# EAGLE board self-balan (EAGLE 9.3.0)
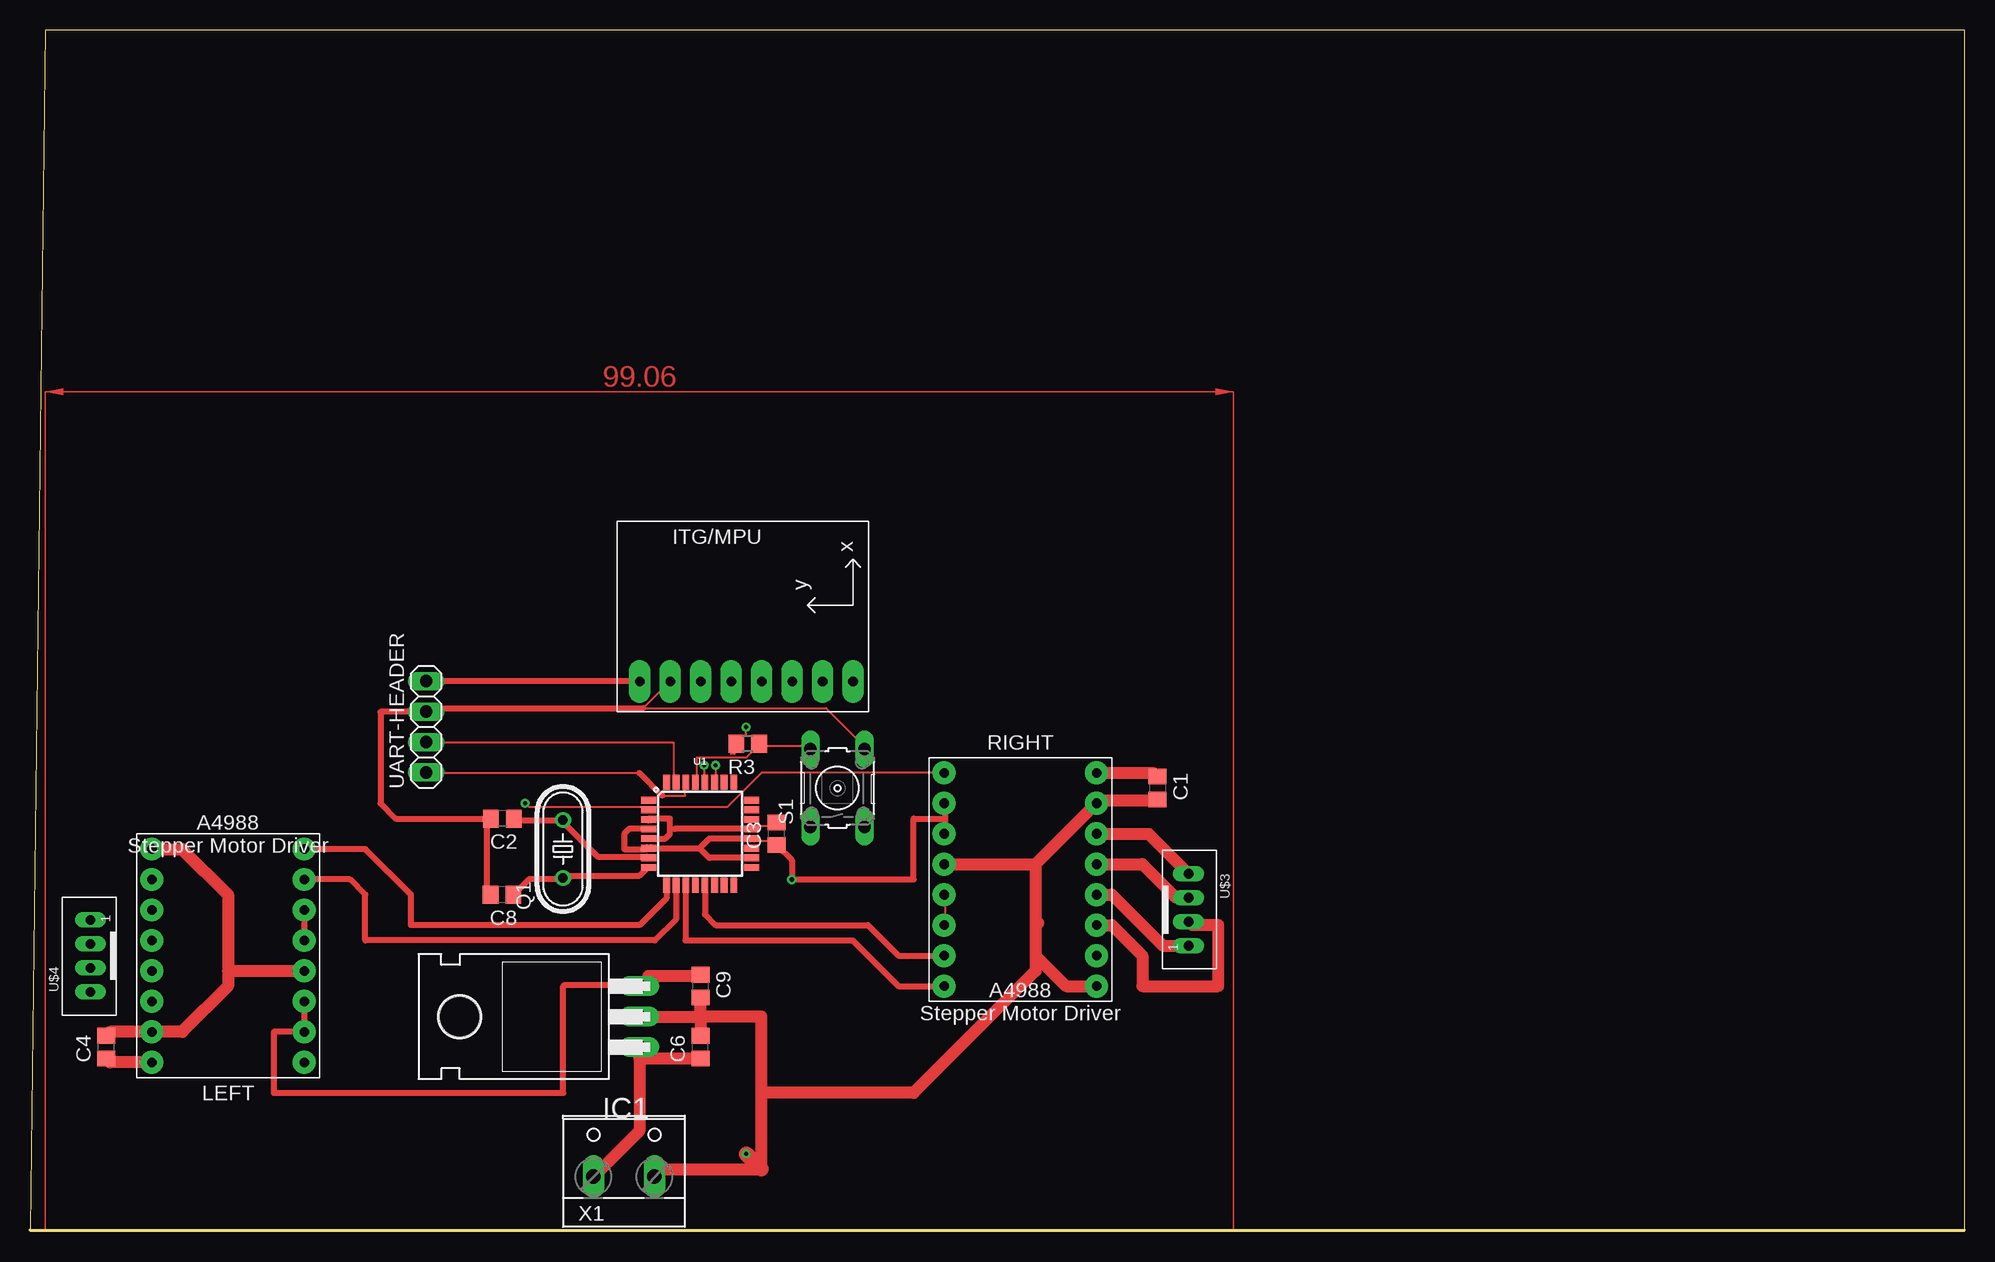
[diagram p0: board, top side]
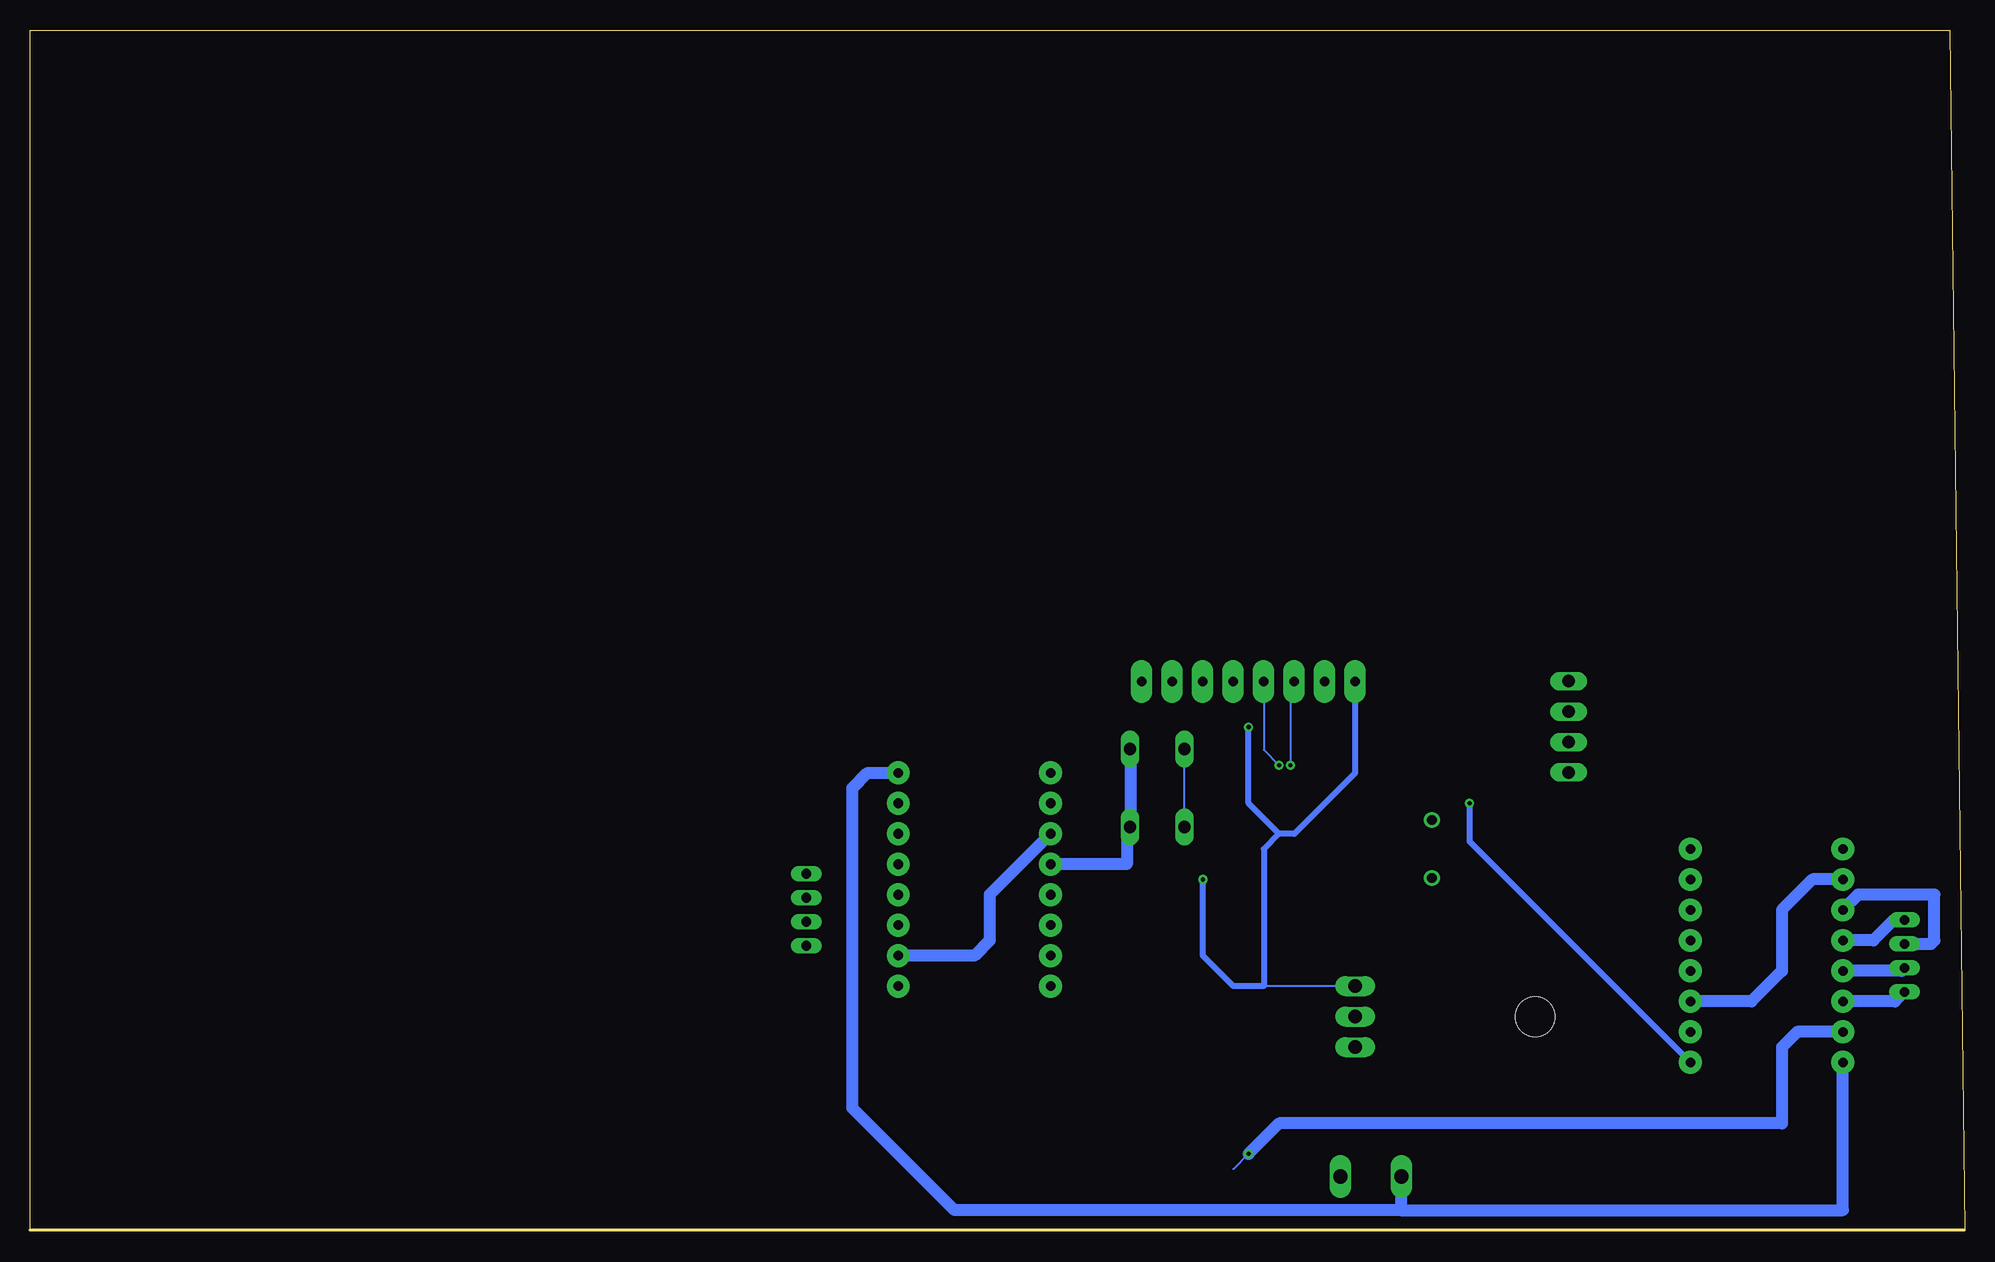
[diagram p1: board, bottom side, seen from below]

Size 161.27 x 100 mm. Coordinates in mm from the lower left corner, seen from the top.
Outline: 0,0 161.27,0 161.27,100 1.27,100 0,0
Copper layers (1*16): Top 0.035mm / dielectric 1.5mm / Bottom 0.035mm
Design rules "default": minimum track width 6mil, minimum drill 0.35mm, track to track 6mil, track to pad 6mil, pad to pad 6mil, via to via 6mil, smd to smd 6mil, copper to edge 40mil, drill to drill 6mil, minimum pad ring 10mil, minimum via ring 8mil, stop-mask expansion 4mil, vias tented up to drill 0mil, thermal gap 10mil

## Footprints (pad centres in the part's own frame; a part is rotated, then mirrored left to right if it is on the bottom)
C0805 = smd 1.3 x 1.5: 1 -0.95,0; 2 0.95,0
TO220H = drill 1.118 long: 1 -2.54,-10.16; 2 0,-10.16; 3 2.54,-10.16 | hole 3.302: 0,4.826
A4988_STEP = drill 0.8 pad 1.905: 1A 6.35,-1.27; 1B 6.35,-3.81; 2A 6.35,1.27; 2B 6.35,3.81; /EN -6.35,8.89; /RST -6.35,-1.27; /SLP -6.35,-3.81; DIR -6.35,-8.89; GND 6.35,6.35; GND2 6.35,-8.89; MS1 -6.35,6.35; MS2 -6.35,3.81; MS3 -6.35,1.27; STEP -6.35,-6.35; VDD 6.35,-6.35; VMOT 6.35,8.89
HC49/S = drill 0.813: 1 -2.413,0; 2 2.413,0
R0805 = smd 1.3 x 1.5: 1 -0.95,0; 2 0.95,0
B3F-10XX = drill 1.016 long: 1 -3.251,2.261; 2 3.251,2.261; 3 -3.251,-2.261; 4 3.251,-2.261
TQFP32-08 = smd 1.27 x 0.559: 1 -4.293,2.8; 2 -4.293,2; 3 -4.293,1.2; 4 -4.293,0.4; 5 -4.293,-0.4; 6 -4.293,-1.2; 7 -4.293,-2; 8 -4.293,-2.8; 17 4.293,-2.8; 18 4.293,-2; 19 4.293,-1.2; 20 4.293,-0.4; 21 4.293,0.4; 22 4.293,1.2; 23 4.293,2; 24 4.293,2.8 | smd 0.559 x 1.27: 9 -2.8,-4.293; 10 -2,-4.293; 11 -1.2,-4.293; 12 -0.4,-4.293; 13 0.4,-4.293; 14 1.2,-4.293; 15 2,-4.293; 16 2.8,-4.293; 25 2.8,4.293; 26 2,4.293; 27 1.2,4.293; 28 0.4,4.293; 29 -0.4,4.293; 30 -1.2,4.293; 31 -2,4.293; 32 -2.8,4.293
GY-521 = drill 0.8 pad 1.778 long: ADO -8.89,-6.35; GND -8.89,6.35; INT -8.89,-8.89; SCL -8.89,3.81; SDA -8.89,1.27; VCC -8.89,8.89; XCL -8.89,-3.81; XDA -8.89,-1.27
JST_B4B-PH_HEADER = drill 0.8 long: P1 2.98,0.048; P2 0.98,0.048; P3 -1.02,0.048; P4 -3.02,0.048
1X04 = drill 1.016 long: 1 -3.81,0; 2 -1.27,0; 3 1.27,0; 4 3.81,0
W237-132 = drill 1.194 long: 1 -2.54,-0.635; 2 2.54,-0.635

## Placement (x,y rotation side)
C1  100u  [C0805]  93.98,36.83 270 top
C2  [C0805]  39.37,34.29 180 top
C3  [C0805]  62.23,33.02 90 top
C4  100u  [C0805]  6.35,15.24 90 top
C6  10u  [C0805]  55.88,15.24 90 top
C8  [C0805]  39.34,27.94 180 top
C9  10u  [C0805]  55.88,20.32 270 top
IC1  7805T  [TO220H]  40.64,17.78 90 top
LEFT  A4988_STEP  [A4988_STEP]  16.51,22.86 180 top
Q1  [HC49/S]  44.42,31.75 90 top
R3  [R0805]  59.82,40.51 180 top
RIGHT  A4988_STEP  [A4988_STEP]  82.55,29.21 0 top
S1  [B3F-10XX]  67.31,36.83 90 top
U1  ATMEGA328P_TQFP  [TQFP32-08]  55.85,33.02 0 top
U2  GY-521MPU6050  [GY-521]  59.72,54.61 90 top
U$3  JST-PH_4-PIN_HEADER  [JST_B4B-PH_HEADER]  96.52,26.67 270 top
U$4  JST-PH_4-PIN_HEADER  [JST_B4B-PH_HEADER]  5.08,22.86 90 top
UART-HEADER  [1X04]  33.02,41.94 90 top
X1  [W237-132]  49.5,5.08 0 top

## Library data of the parts
C1-C4 C6 C8 C9 = rcl; SPICEPREFIX: C
IC1 = linear
LEFT RIGHT = IC
Q1 = crystal; OC_FARNELL: 1667008; OC_NEWARK: unknown
R3 = rcl; SPICEPREFIX: R
S1 = switch-omron; MPN: B3F-1000; OC_FARNELL: 176432; OC_NEWARK: 36M3542
U1 = SparkFun-IC-Microcontroller; PROD_ID: IC-09069
U2 = gy-521
U$3 U$4 = SRG
UART-HEADER = pinhead
X1 = con-wago-508; OC_FARNELL: unknown; OC_NEWARK: unknown

## Nets
+5V: C3.1 C9.1 IC1.3 LEFT.MS1 LEFT.MS2 LEFT.VDD R3.2 RIGHT.MS1 RIGHT.MS2 RIGHT.VDD U1.4 U1.6 U1.18 U1.20 U2.VCC UART-HEADER.4
D3: U1.1
D4: LEFT./EN RIGHT./EN U1.2
D5: LEFT.DIR U1.9
D6: LEFT.STEP U1.10
D7: RIGHT.DIR U1.11
D8: U1.12
D9: RIGHT.STEP U1.13
D10: U1.14
GND: C1.2 C2.2 C4.2 C6.2 C8.2 C9.2 IC1.2 LEFT.GND LEFT.GND2 LEFT.MS3 RIGHT.GND RIGHT.GND2 RIGHT.MS3 S1.3 S1.4 U2.GND UART-HEADER.3 X1.2
MISO: U1.16
MOSI: U1.15
N$2: C2.1 Q1.2 U1.7
N$3: C3.2 U1.3 U1.5 U1.21
N$4: C8.1 Q1.1 U1.8
N$7: RIGHT.2B U$3.P4
N$8: RIGHT.2A U$3.P3
N$9: RIGHT.1B U$3.P2
N$10: RIGHT.1A U$3.P1
N$11: LEFT.2B U$4.P4
N$12: LEFT.2A U$4.P3
N$13: RIGHT./RST RIGHT./SLP
N$14: LEFT.1B U$4.P2
N$15: LEFT.1A U$4.P1
N$16: LEFT./RST LEFT./SLP
RST: R3.1 S1.1 S1.2 U1.29
RXD: U1.31 UART-HEADER.2
SCK: U1.17
SCL: U1.28 U2.SCL
SDA: U1.27 U2.SDA
TXD: U1.30 UART-HEADER.1
VCC: C1.1 C4.1 C6.1 IC1.1 LEFT.VMOT RIGHT.VMOT X1.1

## Tracks (layer width: path | path; a pad name or v marks a point on that pad's centre or on a via)
+5V  (via drill 0.35)
  Top 0.152: 51.56,21.18 50.8,20.42 IC1.3 | 55.83,21.18 C9.1 | 52.17,33.38 51.56,33.38 U1.4 51.44,33.34 | 60.1,32.61 U1.20 | 76.25,33.07 RIGHT.MS2 | 76.25,35.51 RIGHT.MS1 | 51.44,32.07 U1.6 51.72,32.02 | U1.20 60.33,32.38 62.23,32.38 C3.1 | 51.75,32.07 51.72,32.02 | 60.01,32.38 U1.20 | 33.02,45.72 UART-HEADER.4 | 44.45,20.32 44.55,20.42 | 58.42,39.67 58.73,39.67 58.87,39.82 R3.2 59.69,41.34 v59.69,41.91 | 51.45,31.75 51.72,32.02
  Top 0.508: 76.25,35.51 76.25,34.29 | 76.25,34.29 76.25,33.07 | U2.VCC 33.02,45.72 | LEFT.MS2 LEFT.MS1 20.32,16.51 20.32,11.43 44.45,11.43 44.45,20.32 | 44.55,20.42 50.8,20.42 | C3.1 63.5,30.8 v63.5,29.21 73.66,29.21 73.66,34.29 76.25,34.29 | U1.4 49.93,33.42 49.53,33.02 49.53,31.75 51.45,31.75 | U1.6 55.81,31.82 | U1.20 56.61,32.62 55.81,31.82 | U1.18 56.61,31.02 55.81,31.82
  Top 1.016: 51.56,21.18 55.83,21.18
  Bottom 0.152: IC1.3 58.42,20.32
  Bottom 0.508: v63.5,29.21 63.5,22.86 60.96,20.32 58.42,20.32 58.42,31.75 57.15,33.02 | U2.VCC 50.83,38.08 55.88,33.02 57.15,33.02 | 57.15,33.02 59.69,35.56 v59.69,41.91
  Bottom 1.016: LEFT.VDD 12.7,29.21 15.24,26.67 15.24,21.59 17.78,19.05 LEFT.MS2 | RIGHT.MS2 81.28,27.94 81.28,24.13 82.55,22.86 RIGHT.VDD
D4  (via drill 0.35)
  Top 0.152: RIGHT./EN 60.96,38.1 58.1,35.24 51.75,35.24 U1.2 51.44,35.24 41.59,35.24 v41.28,35.56
  Bottom 0.508: LEFT./EN 41.28,32.38 v41.28,35.56
D5
  Top 0.152: 52.93,28.65 U1.9 52.86,28.73
  Top 0.508: U1.9 53.05,27.66 50.8,25.4 31.75,25.4 31.75,27.94 27.94,31.75 LEFT.DIR
D6
  Top 0.508: U1.10 53.86,25.91 52.07,24.13 27.94,24.13 27.94,27.94 26.67,29.21 LEFT.STEP
D7
  Top 0.152: 54.76,28.04 54.76,28.65 U1.11 | 54.66,24.18 54.61,24.13
  Top 0.508: U1.11 54.66,24.18 | RIGHT.DIR 72.39,20.32 68.58,24.13 54.61,24.13
D8
  Top 0.152: 55.37,29.26 55.37,28.8 U1.12
D9
  Top 0.508: U1.13 56.26,26.3 57.15,25.4 69.85,25.4 72.39,22.86 RIGHT.STEP
GND  (via drill 0.35)
  Top 0.152: 55.98,16.31 C6.2 55.83,16.15 | 50.8,17.83 IC1.2 | 52.17,4.57 X1.2 | 93.93,35.81 C1.2 | 83.82,30.48 83.87,30.48 | 83.87,30.48 88.9,35.51 RIGHT.GND | 88.9,20.73 RIGHT.GND2 | 84.02,25.6 83.87,25.76 83.87,30.48 | 6.67,16.51 C4.2 | U2.GND 53.34,45.72 51.12,43.5 66.36,43.5 69.53,40.32 S1.4 | 33.02,43.5 UART-HEADER.3 33,43.18 | 38.1,34.29 C2.2 | C8.2 38.1,28.23 | 55.98,19.36 55.98,19.05 55.98,18.75 C9.2 55.98,19.36
  Top 0.508: 33.02,43.5 51.12,43.5 | 33,43.18 29.21,43.18 29.21,35.56 30.48,34.29 38.1,34.29 38.1,28.23
  Top 1.016: 93.93,35.81 89.15,35.81 RIGHT.GND 83.82,30.48 | RIGHT.MS3 83.82,30.48 | 83.82,30.48 83.82,25.81 | 83.82,25.81 84.02,25.6 | 83.82,25.81 83.82,22.86 | 83.82,22.86 86.36,20.32 RIGHT.GND2 | X1.2 52.68,5.08 60.96,5.08 60.96,11.43 | 60.96,11.43 60.96,17.78 55.88,17.78 | IC1.2 55.88,17.78 | 55.88,17.78 55.88,18.95 55.98,19.05 | 55.88,17.78 C6.2 | 83.82,22.86 83.82,21.59 73.66,11.43 60.96,11.43 | 6.67,16.51 LEFT.GND 12.7,16.51 16.51,20.32 16.51,21.59 | LEFT.GND2 12.7,31.75 16.51,27.94 16.51,21.59 | 16.51,21.59 LEFT.MS3
  Top 1.27: v59.69,6.35 60.96,5.08
  Bottom 0.152: 69.53,33.66 S1.3 | 69.53,40.01 S1.4 | 69.85,33.34 S1.3 | S1.3 69.85,33.3 | v59.69,6.35 60.96,5.08
  Bottom 1.016: 69.53,40.01 69.53,33.66 | 69.85,33.3 69.85,30.48 RIGHT.MS3 | LEFT.GND 13.97,16.51 15.24,15.24 15.24,8.89 57.15,8.89 v59.69,6.35
N$2
  Top 0.152: 51.44,31.11 U1.7 | 44.45,33.97 Q1.2 44.13,34.29 | C2.1 40.45,34.16
  Top 0.508: 51.44,31.11 47.31,31.11 44.45,33.97 | 40.45,34.16 Q1.2
N$3
  Top 0.152: 51.75,32.7 U1.5 | 51.75,33.97 U1.3 51.63,34.29 | C3.2 62.23,33.66 60.33,33.66 U1.21 60.01,33.66 | 53.74,33.42 53.34,33.02
  Top 0.508: 51.56,34.14 U1.3 | U1.5 52.94,32.62 53.34,33.02 53.34,34.29 51.63,34.29 | U1.21 53.74,33.42
N$4
  Top 0.152: 51.44,30.16 U1.8 | 44.45,29.53 Q1.1 44.13,29.21 | 40.32,27.94 C8.1
  Top 0.508: 51.44,30.16 50.8,29.53 44.45,29.53 | 40.32,27.94 41.59,29.21 44.13,29.21
N$7
  Top 1.016: RIGHT.2B 93.24,33.02 U$3.P4
N$8
  Top 1.016: RIGHT.2A 92.71,30.48 95.5,27.69 U$3.P3
N$9
  Top 0.152: 96.86,25.4 U$3.P2
  Top 1.016: RIGHT.1B 90.17,25.4 92.71,22.86 92.71,20.32 99.06,20.32 99.06,25.4 96.86,25.4
N$10
  Top 1.016: RIGHT.1A 90.17,27.94 94.42,23.69 U$3.P1
N$11
  Bottom 1.016: U$4.P4 5.82,19.05 LEFT.2B
N$12
  Bottom 1.016: U$4.P3 5.28,21.59 LEFT.2A
N$13
  Top 0.152: RIGHT./SLP 76.25,25.45 76.25,27.89 RIGHT./RST
N$14
  Bottom 0.152: 2.83,23.84 2.54,24.13
  Bottom 1.016: U$4.P2 2.83,23.84 | LEFT.1B 8.89,27.94 2.54,27.94 2.54,24.13
N$15
  Bottom 1.016: U$4.P1 5.91,25.84 7.62,24.13 LEFT.1A
N$16
  Top 0.508: LEFT./SLP LEFT./RST
RST
  Top 0.152: U1.29 55.56,37.47 55.56,39.37 59.69,39.37 60.64,40.32 R3.1 60.96,40.32 64.77,40.32 S1.2
  Bottom 0.152: S1.1 65.09,33.66 65.09,40.01 S1.2
RXD
  Top 0.152: U1.31 53.66,37.47 53.66,40.64 33.02,40.64 UART-HEADER.2
SCL  (via drill 0.35)
  Top 0.152: v56.2,38.73 56.2,37.47 U1.28
  Bottom 0.152: v56.2,38.73 56.2,45.72 U2.SCL
SDA  (via drill 0.35)
  Top 0.152: v57.15,38.73 57.15,37.47 U1.27
  Bottom 0.152: v57.15,38.73 58.42,40.01 58.42,45.72 U2.SDA
TXD
  Top 0.152: 52.71,36.2 54.61,36.2 54.61,37.15 U1.30 | 50.8,38.1 33.02,38.1 UART-HEADER.1
  Top 0.508: 50.8,38.1 52.71,36.2
VCC
  Top 0.152: 93.93,37.8 C1.1 94.08,37.64 | 55.83,14.17 C6.1 | 10.26,13.87 LEFT.VMOT | 46.84,4.57 X1.1 | 55.98,14.33 C6.1 | 55.83,14.33 C6.1 | 6.67,13.97 C4.1
  Top 1.016: RIGHT.VMOT 93.62,38.1 93.93,37.8 | X1.1 50.8,8.28 50.8,14.33 | IC1.1 50.8,14.33 | 50.8,14.33 55.83,14.33 | LEFT.VMOT 6.67,13.97
  Bottom 1.016: X1.1 46.99,4.42 46.99,1.65 | 46.99,1.65 84.2,1.65 86.36,3.81 92.71,10.16 92.71,36.83 91.44,38.1 RIGHT.VMOT | 46.99,1.65 10.16,1.65 LEFT.VMOT
(copper drawn outside any net)
  shapes: Top area x1